# Allegro board 08_051837b.brd
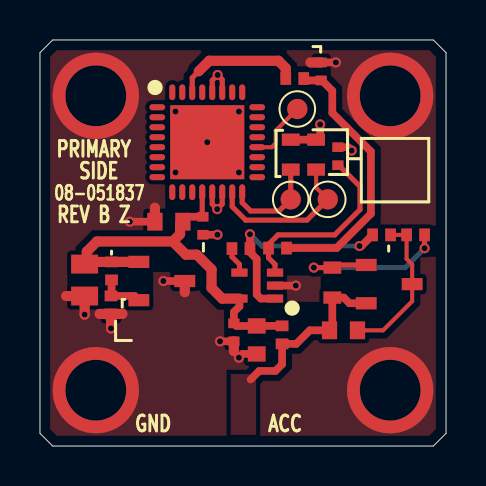
[diagram p0: board, top side]
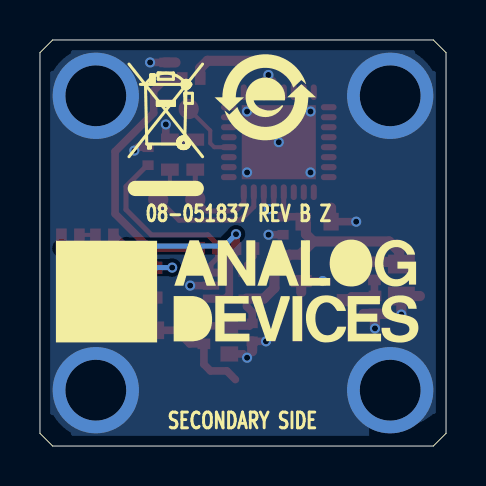
[diagram p1: board, bottom side, seen from below]

Outline 20.32 x 20.32 mm; copper layers: TOP, BOTTOM. Coordinates in mm from the lower left corner of the outline.
Outline path: 0,19.68 0.64,20.32 19.68,20.32 20.32,19.68 20.32,0.64 19.68,0 0.64,0 0,0.64 0,19.68

## Design rules (mm)
constraint set DEFAULT: min track width 0.203

## Placement (name value [footprint] x y rotation side)
C1  10uF  [C0805H60]  2.24 8.31 90 top
C2  0.1uF  [C0402]  8.15 11.02 90 top
C3  1UF  [C0603]  6.45 11.23 0 top
C4  4700PF  [C0402]  14.07 18.75 270 top
C5  4700PF  [C0402]  14.91 14.5 270 top
C6  0.1uF  [C0402]  9.7 5.69 270 top
C7  1UF  [C0603]  10.85 5.31 270 top
C8  0.022uF  [C0603]  15.19 5.79 180 top
IC1  TLVH432BIDBZR  [SOT23_B]  6.1 8.26 270 top
IC2  ADXL1002BCPZ  [QFN32_5X5_PAD3_7X3_7]  8.37 15.2 270 top
IC3  AD8541AKSZ-R2  [SC70-5]  10.87 8.03 90 top
IC4  TL432BIDBZR  [SOT23_B]  17.48 8.1 270 top
NOREF  -  []  -198.96 -79.22 0 top
NOREF#2  -  []  -202.72 -33.5 0 top
NOREF#3  -  []  61.65 260.07 0 top
NOREF#4  -  []  0 0.64 0 top
NOREF#5  -  []  0 20.32 270 top
NOREF#6  -  []  20.32 0 90 top
NOREF#7  -  []  0.64 0 0 top
NOREF#8  -  []  20.32 20.32 180 top
NOREF#9  -  []  0 19.68 0 top
NOREF#10  -  []  -199.01 -56.36 0 top
NOREF#11  -  []  20.32 0.64 0 top
NOREF#12  -  []  -233.93 -118.87 0 top
NOREF#13  -  []  2.79 2.79 0 top
NOREF#14  -  []  0 0 0 top
NOREF#15  -  []  11.61 28.17 0 top
NOREF#16  -  []  2.79 2.79 0 top
NOREF#17  -  []  0.64 20.32 0 top
NOREF#18  -  []  -330.4 -227.36 0 top
NOREF#19  -  []  -330.4 -227.36 0 top
NOREF#20  -  []  -206.25 31.75 0 top
NOREF#21  -  []  -46.48 223.98 0 top
NOREF#22  -  []  19.68 0 90 top
NOREF#23  -  []  14.22 12.57 180 bottom
NOREF#24  -  []  9.04 17.45 180 bottom
NOREF#25  -  []  9.96 6.45 180 bottom
OR  TESTPAD  [TPSMC40]  12.88 16.87 0 top
R1  51K  [R0402]  3.56 7.06 90 top
R2  150K  [R0402]  3.58 8.76 90 top
R3  3.3K  [R0402]  12.12 5.56 270 top
R4  470K  [R0603]  12.55 14.58 90 top
R5  470K  [R0603]  13.82 14.58 90 top
R6  680  [R0402]  12.75 18.39 0 top
R7  0  [R0402]  10.06 9.88 0 top
R8  1.3K  [R0402]  11.89 9.91 180 top
R9  0  [R0402]  17.09 10.57 0 top
R10  36K  [R0402]  18.8 10.57 0 top
R11  100K  [R0603]  14.63 8.18 270 top
ST  TESTPAD  [TPSMC40]  12.55 12.34 0 top
STB  TESTPAD  [TPSMC40]  14.4 12.34 0 top

## Library data of the parts
C1 = CAP: User Part Number: UPN; Tolerance: 10; alternate symbols: C0805L; part number: CAP_SM-10UF,10V,10,E019880,C0805H60; tolerance: 10
C2 C6 = CAP: User Part Number: UPN; Tolerance: 10; alternate symbols: C0402L; part number: CAP_SM-0.1UF,10V,10,E016510,C0402; tolerance: 10
C3 C7 = CAP: User Part Number: UPN; Tolerance: 10; alternate symbols: C0603L; part number: CAP_SM-1UF,25V,10,E026591,C0603; tolerance: 10
C4 C5 = CAP: User Part Number: UPN; Tolerance: 10; alternate symbols: C0402L; part number: CAP_SM-4700PF,50V,10,E028612,C0402; tolerance: 10
C8 = CAP: User Part Number: UPN; Tolerance: 10; alternate symbols: C0603L; part number: CAP_SM-0.022UF,50V,10,E015725,C0603; tolerance: 10
IC1 = ICTLVH432: User Part Number: UPN; Tolerance: N/A; alternate symbols: (); part number: ICTLVH432_SM-TLVH432BIDBZR,E034193,SOT23_B; tolerance: N/A
IC2 = ADXL100X: User Part Number: UPN; Tolerance: N/A; alternate symbols: (); part number: ADXL100X_SM-ADXL1002BCPZ,E026572,QFN32_5X5_PAD3_7X3_7; tolerance: N/A
IC3 = AD8541ART: Tolerance: N/A; User Part Number: UPN; alternate symbols: (); part number: AD8541ART_SM-AD8541AKSZ-R2,E007760,SC70-5; tolerance: N/A
IC4 = ICTL432: User Part Number: UPN; Tolerance: N/A; alternate symbols: (); part number: ICTL432_SM-TL432BIDBZR,E034192,SOT23_B; tolerance: N/A
OR ST STB = NCTESTPAD: Tolerance: N/A; User Part Number: UPN; alternate symbols: (); part number: NCTESTPAD_SM-TESTPAD,E019801,TPSMC40; tolerance: N/A
R1 = RES: User Part Number: UPN; Tolerance: 1; alternate symbols: R0402L; part number: RES_SM-51K,E013080,1/10W,1,R0402; tolerance: 1
R2 = RES: User Part Number: UPN; Tolerance: 1; alternate symbols: R0402L; part number: RES_SM-150K,E020496,1/10W,1,R0402; tolerance: 1
R3 = RES: User Part Number: UPN; Tolerance: 1; alternate symbols: R0402L; part number: RES_SM-3.3K,E010034,1/10W,1,R0402; tolerance: 1
R4 R5 = RES: User Part Number: UPN; Tolerance: 1; alternate symbols: R0603L; part number: RES_SM-470K,E027490,1/10W,1,R0603; tolerance: 1
R6 = RES: User Part Number: UPN; Tolerance: 1; alternate symbols: R0402L; part number: RES_SM-680,E015602,1/10W,1,R0402; tolerance: 1
R7 = RES: User Part Number: UPN; Tolerance: 1; alternate symbols: (R0402L); part number: RES_SM-0,E010661,1/16W,1,R0402; tolerance: 1
R8 = RES: User Part Number: UPN; Tolerance: 1; alternate symbols: R0402L; part number: RES_SM-1.3K,E015613,1/10W,1,R0402; tolerance: 1
R9 = RES: User Part Number: UPN; Tolerance: 1; alternate symbols: R0402L; part number: RES_SM-0,E010661,1/16W,1,R0402; tolerance: 1
R10 = RES: User Part Number: UPN; Tolerance: 1; alternate symbols: R0402L; part number: RES_SM-36K,E018748,1/16W,1,R0402; tolerance: 1
R11 = RES: User Part Number: UPN; Tolerance: 1; alternate symbols: R0603L; part number: RES_SM-100K,E010279,1/10W,1,R0603; tolerance: 1

## Footprints (pads in the part's own frame, mm; a bottom-side part is the same pattern mirrored in y, then rotated)
C0402
  rect 0.483x0.559 smd: 1(-0.45,0) 2(0.45,0)
C0603
  rect 0.762x0.889 smd: 1(-0.7,0) 2(0.7,0)
C0805H60
  rect 0.94x1.346 smd: 1(-0.8,0) 2(0.8,0)
QFN32_5X5_PAD3_7X3_7
  oval 0.305x0.787 smd: 1(-1.75,-2.5) 2(-1.25,-2.5) 3(-0.75,-2.5) 4(-0.25,-2.5) 5(0.25,-2.5) 6(0.75,-2.5) 7(1.25,-2.5) 8(1.75,-2.5) 17(1.75,2.5) 18(1.25,2.5) 19(0.75,2.5) 20(0.25,2.5) 21(-0.25,2.5) 22(-0.75,2.5) 23(-1.25,2.5) 24(-1.75,2.5)
  oval 0.787x0.305 smd: 9(2.5,-1.75) 10(2.5,-1.25) 11(2.5,-0.75) 12(2.5,-0.25) 13(2.5,0.25) 14(2.5,0.75) 15(2.5,1.25) 16(2.5,1.75) 25(-2.5,1.75) 26(-2.5,1.25) 27(-2.5,0.75) 28(-2.5,0.25) 29(-2.5,-0.25) 30(-2.5,-0.75) 31(-2.5,-1.25) 32(-2.5,-1.75)
  rect 3.708x3.708 smd: PAD(0,0)
R0402
  rect 0.533x0.635 smd: 1(-0.45,0) 2(0.45,0)
R0603
  rect 0.61x0.889 smd: 1(-0.75,0) 2(0.75,0)
SC70-5
  rect 0.406x0.813 smd: 1(-0.65,-0.89) 2(0,-0.89) 3(0.65,-0.89) 4(0.65,0.89) 5(-0.65,0.89)
SOT23_B
  rect 0.61x1.041 smd: 1(-0.958,-1.15) 2(0.958,-1.15) 3(0,1.15)
TPSMC40
  round 1.016 smd: 1(0,0)

## Nets
GND: C1.1 C2.1 C3.1 C4.1 C5.1 C6.2(N2) C7.2(N2) IC1.3 IC2.13 IC2.14 IC2.27 IC2.28(VSS_4) IC2.PAD IC3.2(V-) R1.1 R4.2(N2) R5.2(N2)
VCCLD: C8.2(N2) IC4.2 R3.2(N2) R11.2(N2)
VDD: C1.2(N2) C2.2(N2) C3.2(N2) C6.1 C7.1 IC1.1 IC2.12 IC3.5 R2.2(N2) R3.1
OR: IC2.20 OR.1(N1)
UNNAMED_2_AD8541ART_I10_: IC3.4 R7.1
UNNAMED_2_AD8541ART_I10__1: C5.2(N2) IC3.3 R8.2(N2)
UNNAMED_2_ADXL100X_I1_ST: IC2.16 R4.1 ST.1(N1)
UNNAMED_2_ADXL100X_I1_STANDBY: IC2.15 R5.1 STB.1(N1)
UNNAMED_2_ADXL100X_I1_VOUT: IC2.30 R6.1
UNNAMED_2_CAP_I43_N1: C8.1 IC4.3 R9.2(N2) R10.1
UNNAMED_2_ICTL432_I45_REF: IC4.1(REF) R10.2(N2) R11.1
UNNAMED_2_RES_I34_N2: IC1.2(REF) R1.2(N2) R2.1
VOUT_CR: C4.2(N2) R6.2(N2) R8.1
VOUT_OP: IC3.1 R7.2(N2) R9.1

Pads without a net: IC2 1 2 3 4 5 6 7 8 9 10 11 17 18 19 21 22 23 24 25 26 29 31 32

## Via types
v1: diameter 0.508, hole 0.305, TOP to BOTTOM, 22 vias
v2: diameter 4.318, hole 3.048, TOP to BOTTOM, 4 vias

## Routing (per net, layer and track width the routed paths; a pad name or vN(x,y) marks a point on that pad's centre or on a via; arc(x,y) is an arc through that point)
GND: length 19.2
  TOP w0.254: IC2.27 9.12,18.34 v1(8.89,18.57) 8.62,18.3 IC2.28 ; IC2.13 8.62,12.11 8.81,11.91 8.81,11.91 v1(8.87,11.85) 9.12,12.11 IC2.14
  TOP w0.381: v1(14.81,19.2) C4.1 ; v1(14.02,16.09) 14.02,15.53 R5.2 R4.2 ; C7.2 10.15,4.61 v1(9.96,4.42) ; IC1.3 v1(6.17,8.26) ; C3.1 v1(4.5,11.23) ; C5.1 15.43,14.95 v1(15.6,14.78) ; C6.2 v1(9.01,5.24) ; IC3.2 v1(12.8,8.03) ; C2.1 v1(8.88,10.57)
  TOP w0.508: 2.98,6.61 R1.1 ; R1.1 4.13,6.61 ; R1.1 v1(3.56,5.89) ; v1(2.24,6.58) C1.1 1.31,7.51 ; 9.7,4.74 C6.2 ; 7.25,7.7 IC1.3 ; C3.1 5.75,11.93 ; 13.54,19.2 C4.1
  vias: v1(6.78,16.74) v1(6.78,13.69) v1(8.37,15.2) v1(9.96,16.74) v1(9.96,13.69) v2(2.79,17.53) v2(2.79,2.79) v2(17.53,17.53) v2(17.53,2.79)
VCCLD: length 9.1
  TOP w0.381: 10.54,3.33 10.97,3.76 11.79,3.76 12.12,4.09 R3.2 12.83,5.11 13.51,5.79 C8.2 14.63,5.93 R11.2 15.2,7.43 15.49,7.15 IC4.2
VDD: length 20.2
  TOP w0.254: C2.2 8.12,11.51 IC2.12
  TOP w0.381: C3.2 7.4,11.47 C2.2 ; R3.1 10.85,6.01 C7.1 9.83,6.01 C6.1 9.7,6.71 9.98,6.98 IC3.5
  TOP w0.508: C1.2 2.34,9.21 ; 2.34,9.21 2.34,9.73 2.85,10.24 6.64,10.24 ; 2.34,9.21 R2.2 IC1.1 ; IC3.5 9.12,7.38 8.59,7.91 8.59,8.84 7.85,9.58 7.3,9.58 6.64,10.24 ; 6.64,10.24 7.01,10.6 7.01,11.09 C3.2
OR: length 3.2
  TOP w0.203: OR.1 11.8,15.79 11.8,15.15 11.6,14.95 IC2.20
UNNAMED_2_AD8541ART_I10_: length 1.4
  TOP w0.254: R7.1 9.61,9.47 9.98,9.09 IC3.4
UNNAMED_2_AD8541ART_I10__1: length 9.5
  TOP w0.254: IC3.3 11.76,9.09 11.44,9.42 R8.2 11.44,10.09 11.91,10.57 14.75,10.57 16.01,11.83 16.01,12.99 14.95,14.05 C5.2
UNNAMED_2_ADXL100X_I1_ST: length 4.9
  TOP w0.254: IC2.16 10.12,12.18 10.54,11.76 11.96,11.76 ST.1 12.55,13.18 12.55,13.18 R4.1
UNNAMED_2_ADXL100X_I1_STANDBY: length 7.9
  TOP w0.203: R5.1 13.82,12.93 STB.1
  TOP w0.254: STB.1 13.36,11.3 10.3,11.3 9.62,11.98 IC2.15
UNNAMED_2_ADXL100X_I1_VOUT: length 6.4
  TOP w0.254: 7.94,18.75 7.62,18.43 IC2.30
  TOP w0.508: 7.94,18.75 8.47,19.28 11.93,19.28 12.3,18.91 R6.1
UNNAMED_2_CAP_I43_N1: length 7.6
  TOP w0.203: R9.2 18.34,10.57 R10.1 18.35,9.36 18.63,9.09 IC4.3 18.63,7.25 17.17,5.79 C8.1
UNNAMED_2_ICTL432_I45_REF: length 9.3
  TOP w0.254: R10.2 v1(19.25,9.9) ; IC4.1 14.76,9.06 R11.1 v1(13.7,8.93)
  BOTTOM w0.254: v1(19.25,9.9) 18.28,8.93 v1(13.7,8.93)
UNNAMED_2_RES_I34_N2: length 2.3
  TOP w0.381: R2.1 3.58,7.54 R1.2 4.73,7.51 IC1.2
VOUT_CR: length 13.6
  TOP w0.381: R6.2 13.3,18.3 C4.2 14.11,18.3 14.63,17.78 14.63,16.67 16.56,14.74 16.56,11.62 14.84,9.91 R8.1
VOUT_OP: length 10.8
  TOP w0.381: R9.1 16.09,10.01 v1(15.99,10.01) ; IC3.1 11.05,7.38 10.85,7.58 10.85,9.36 10.51,9.69 R7.2 v1(10.51,10.6)
  BOTTOM w0.254: v1(10.51,10.6) 11.1,10.01 v1(15.99,10.01)

## Copper pours and planes (outline as drawn; the poured copper is in the pictures)
GND on TOP: 7,0.56 7,3.61 8.27,3.61 8.27,0.56
GND on TOP: 0.85,0.51 0.51,0.85 0.51,19.47 0.85,19.81 19.47,19.81 19.81,19.47 19.81,10.52 18.97,10.52 18.97,10.03 18.34,10.03 18.34,10.31 15.93,10.31 15.93,8.86 14.05,8.86 14.05,7.47 15.93,7.47 15.93,6.78 14.99,6.78 14.99,7.21 13.03,7.21 13.03,7.24 10.11,7.24 10.11,5.71 13.03,5.71 13.03,6.3 14.68,6.3 14.68,5.16 15.95,5.16 15.95,6.58 18.34,6.58 18.34,9.04 19.02,9.04 19.02,9.47 19.81,9.47 19.81,0.85 19.47,0.51 ; 10 cut-outs
GND on BOTTOM: 0.85,0.51 0.51,0.85 0.51,19.47 0.85,19.81 19.47,19.81 19.81,19.47 19.81,0.85 19.47,0.51 ; 4 cut-outs
VCCLD on TOP: 9.54,3.61 9.54,0.56 10.81,0.56 10.81,3.61

## Text on the board
Ref Des/Silkscreen Bottom: SECONDARY SIDE | 08-051837 REV B Z
Ref Des/Silkscreen Top: 08-051837 | PRIMARY | REV B Z | SIDE | GND | ACC
PAGE_OUTLINE: 29NOV18 | B | AS PER ECR-085638 | 26FEB19 | M.ENDO | ADXL1002 IEPE
DIMENSION: DIA MAX | (REF)
User.45: FIGURE | SIZE | 12.0 | 120.0 | PLATED | FINISHED HOLES IN MILS | ALL UNITS ARE IN MILS | QTY | 22 | 4 | TOLERANCE/NOTES
